# EAGLE board MUXBreakout v46 (EAGLE 9.7.0)
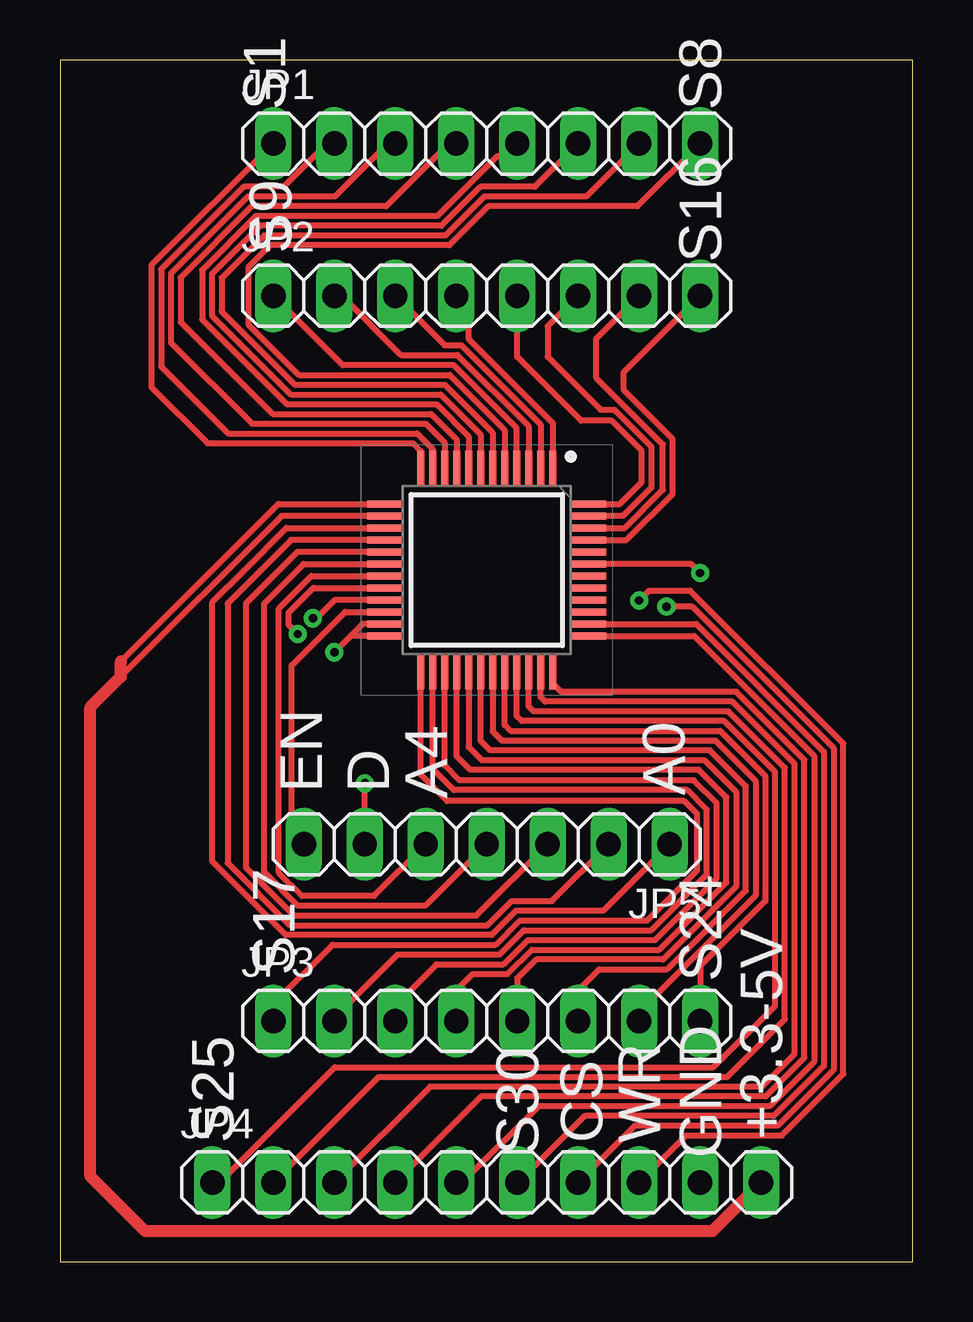
[diagram p0: board, top side]
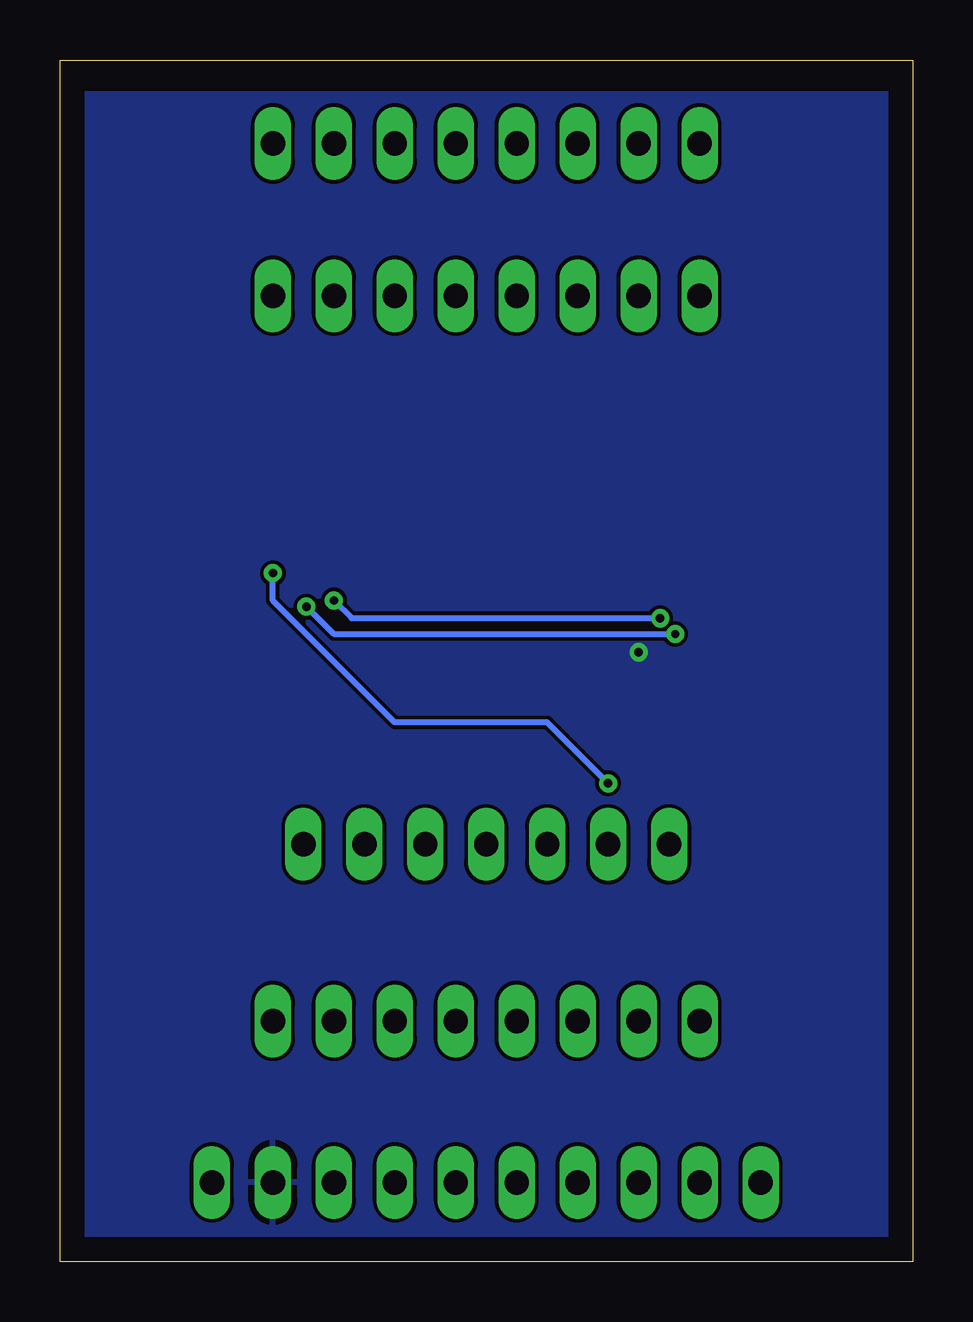
[diagram p1: board, bottom side, seen from below]

Size 35.54 x 50.09 mm. Coordinates in mm from the lower left corner, seen from the top.
Outline: 0,0 35.54,0 35.54,50.09 0,50.09 0,0
Copper layers (1*16): Top 0.035mm / dielectric 1.5mm / Bottom 0.035mm
Design rules "default": minimum track width 6mil, minimum drill 0.35mm, track to track 6mil, track to pad 6mil, pad to pad 6mil, via to via 6mil, smd to smd 6mil, copper to edge 40mil, drill to drill 6mil, minimum pad ring 10mil, minimum via ring 8mil, stop-mask expansion 4mil, vias tented up to drill 0mil, thermal gap 10mil

## Footprints (pad centres in the part's own frame; a part is rotated, then mirrored left to right if it is on the bottom)
QFP50P900X900X120-48N = smd 1.475 x 0.3: 1 -4.238,2.75; 2 -4.238,2.25; 3 -4.238,1.75; 4 -4.238,1.25; 5 -4.238,0.75; 6 -4.238,0.25; 7 -4.238,-0.25; 8 -4.238,-0.75; 9 -4.238,-1.25; 10 -4.238,-1.75; 11 -4.238,-2.25; 12 -4.238,-2.75; 25 4.238,-2.75; 26 4.238,-2.25; 27 4.238,-1.75; 28 4.238,-1.25; 29 4.238,-0.75; 30 4.238,-0.25; 31 4.238,0.25; 32 4.238,0.75; 33 4.238,1.25; 34 4.238,1.75; 35 4.238,2.25; 36 4.238,2.75 | smd 0.3 x 1.475: 13 -2.75,-4.238; 14 -2.25,-4.238; 15 -1.75,-4.238; 16 -1.25,-4.238; 17 -0.75,-4.238; 18 -0.25,-4.238; 19 0.25,-4.238; 20 0.75,-4.238; 21 1.25,-4.238; 22 1.75,-4.238; 23 2.25,-4.238; 24 2.75,-4.238; 37 2.75,4.238; 38 2.25,4.238; 39 1.75,4.238; 40 1.25,4.238; 41 0.75,4.238; 42 0.25,4.238; 43 -0.25,4.238; 44 -0.75,4.238; 45 -1.25,4.238; 46 -1.75,4.238; 47 -2.25,4.238; 48 -2.75,4.238
1X08 = drill 1.016 long: 1 -8.89,0; 2 -6.35,0; 3 -3.81,0; 4 -1.27,0; 5 1.27,0; 6 3.81,0; 7 6.35,0; 8 8.89,0
1X10 = drill 1.016 long: 1 -11.43,0; 2 -8.89,0; 3 -6.35,0; 4 -3.81,0; 5 -1.27,0; 6 1.27,0; 7 3.81,0; 8 6.35,0; 9 8.89,0; 10 11.43,0
1X07 = drill 1.016 long: 1 -7.62,0; 2 -5.08,0; 3 -2.54,0; 4 0,0; 5 2.54,0; 6 5.08,0; 7 7.62,0

## Placement (x,y rotation side)
IC2  ADG732BSUZ-REEL  [QFP50P900X900X120-48N]  17.78,28.83 270 top
JP1  PINHD-1X8  [1X08]  17.78,46.61 0 top
JP2  PINHD-1X8  [1X08]  17.78,40.26 0 top
JP3  PINHD-1X8  [1X08]  17.78,10.03 0 top
JP4  PINHD-1X10  [1X10]  17.78,3.3 0 top
JP5  PINHD-1X7  [1X07]  17.78,17.4 180 top

## Library data of the parts
IC2 = ADG732BSUZ-REEL; DESCRIPTION: 16-/32-Channel, 4 , +1.8 V to +5.5 V and +/-2.5 V Analog Multiplexers.; HEIGHT: 1.2mm; MANUFACTURER_NAME: Analog Devices; MANUFACTURER_PART_NUMBER: ADG732BSUZ-REEL; MOUSER_PART_NUMBER: 584-ADG732BSUZ-R; MOUSER_PRICE-STOCK: https://www.mouser.co.uk/ProductDetail/Analog-Devices/ADG732BSUZ-REEL?qs=BpaRKvA4VqGYLEdHjoL3%2FQ%3D%3D
JP1-JP3 = Connector; CATEGORY: Headers; DESCRIPTION: Header, Straight, 8 Position; MANUFACTURER: Generic; MPN: Generic; OPERATING_TEMPERATURE: Generic; PART_STATUS: Active; PITCH: 0.100" (2.54mm); ROHS_COMPLIANCE: Generic; SERIES: Generic; SUB-CATEGORY: Headers, Male Pins; TYPE: Board to Board or Cable, Unshrouded, Through Hole, Straight
JP4 = Connector; CATEGORY: Headers; DESCRIPTION: Header, Straight, 10 Position; MANUFACTURER: Generic; MPN: Generic; OPERATING_TEMPERATURE: Generic; PART_STATUS: Active; PITCH: 0.100" (2.54mm); ROHS_COMPLIANCE: Generic; SERIES: Generic; SUB-CATEGORY: Headers, Male Pins; TYPE: Board to Board or Cable, Unshrouded, Through Hole, Straight
JP5 = Connector; CATEGORY: Headers; DESCRIPTION: Header, Straight, 7 Position; MANUFACTURER: Generic; MPN: Generic; OPERATING_TEMPERATURE: Generic; PART_STATUS: Active; PITCH: 0.100" (2.54mm); ROHS_COMPLIANCE: Generic; SERIES: Generic; SUB-CATEGORY: Headers, Male Pins; TYPE: Board to Board or Cable, Unshrouded, Through Hole, Straight

## Nets
!EN: IC2.22 JP5.7
A0: IC2.15 JP5.1
A1: IC2.16 JP5.2
A2: IC2.17 JP5.3
A3: IC2.18 JP5.4
A4: IC2.19 JP5.5
D: IC2.43 JP5.6
GND: IC2.23 IC2.24 JP4.9
NC_1: IC2.41
NC_2: IC2.42
NC_3: IC2.44
S1: IC2.12 JP1.1
S2: IC2.11 JP1.2
S3: IC2.10 JP1.3
S4: IC2.9 JP1.4
S5: IC2.8 JP1.5
S6: IC2.7 JP1.6
S7: IC2.6 JP1.7
S8: IC2.5 JP1.8
S9: IC2.4 JP2.1
S10: IC2.3 JP2.2
S11: IC2.2 JP2.3
S12: IC2.1 JP2.4
S13: IC2.48 JP2.5
S14: IC2.47 JP2.6
S15: IC2.46 JP2.7
S16: IC2.45 JP2.8
S17: IC2.25 JP3.1
S18: IC2.26 JP3.2
S19: IC2.27 JP3.3
S20: IC2.28 JP3.4
S21: IC2.29 JP3.5
S22: IC2.30 JP3.6
S23: IC2.31 JP3.7
S24: IC2.32 JP3.8
S25: IC2.33 JP4.1
S26: IC2.34 JP4.2
S27: IC2.35 JP4.3
S28: IC2.36 JP4.4
S29: IC2.37 JP4.5
S30: IC2.38 JP4.6
S31: IC2.20 JP4.7
S32: IC2.21 JP4.8
VDD_2: IC2.13 IC2.14 JP4.10

## Tracks (layer width: path | path; a pad name or v marks a point on that pad's centre or on a via)
!EN
  Top 0.254: JP5.7 9.65,17.91 9.65,24.85 11.88,27.08 IC2.22
A0
  Top 0.254: IC2.15 9.44,30.58 7.65,28.8 6.35,27.49 6.35,16.67 9.41,13.61 17.98,13.61 19,14.63 22.63,14.63 JP5.1
A1
  Top 0.254: IC2.16 9.63,30.08 8.36,28.81 6.98,27.43 6.98,16.62 9.58,14.02 17.81,14.02 18.83,15.04 20.5,15.04 JP5.2
A2
  Top 0.254: JP5.3 17.35,14.43 9.75,14.43 7.75,16.43 7.75,27.43 8.62,28.31 9.89,29.58 IC2.17
A3
  Top 0.254: JP5.4 15.22,14.83 9.92,14.83 8.51,16.24 8.51,27.43 8.76,27.69 10.16,29.08 IC2.18
A4
  Top 0.254: JP5.5 13.08,15.24 10.08,15.24 9.12,16.21 9.12,27.22 10.48,28.58 IC2.19
D  (via drill 0.35)
  Top 0.254: JP5.6 v12.7,19.94 | v26.67,28.7 26.29,29.08 IC2.43
  Bottom 0.254: v12.7,19.94 15.24,22.48 21.59,22.48 26.67,27.56 v26.67,28.7
GND  (via drill 0.35)
  Top 0.254: IC2.23 12.61,26.58 12.06,26.03 | 12.06,26.03 v11.43,25.4 | IC2.24 12.11,26.08 12.06,26.03
  pour Bottom: 0.13,1.02 35.41,1.02 35.41,48.69 0.13,48.69
S1
  Top 0.254: IC2.12 15.03,33.8 14.71,34.11 6.15,34.11 3.81,36.45 3.81,41.53 JP1.1
S2
  Top 0.254: IC2.11 15.53,33.87 14.88,34.52 7.01,34.52 4.22,37.31 4.22,41.36 7.66,44.81 9.32,44.81 11.12,46.61 JP1.2
S3
  Top 0.254: IC2.10 16.03,34.13 15.24,34.92 8,34.92 4.62,38.3 4.62,41.19 7.83,44.4 11.46,44.4 13.67,46.61 JP1.3
S4
  Top 0.254: IC2.9 16.53,34.27 15.47,35.33 8.87,35.33 5.03,39.17 5.03,41.02 8,43.99 13.59,43.99 16.2,46.61 JP1.4
S5
  Top 0.254: IC2.8 17.03,34.4 15.69,35.74 9.45,35.74 5.92,39.27 5.92,41.34 8.17,43.59 15.72,43.59 18.21,46.08 18.52,46.08 JP1.5
S6
  Top 0.254: IC2.7 17.53,34.47 15.86,36.14 9.62,36.14 6.32,39.44 6.32,41.17 8.33,43.18 15.89,43.18 17.52,44.81 19.79,44.81 JP1.6
S7
  Top 0.254: IC2.6 18.03,34.55 16.03,36.55 9.79,36.55 6.73,39.61 6.73,41 8.5,42.77 16.06,42.77 17.68,44.4 21.92,44.4 JP1.7
S8
  Top 0.254: IC2.5 18.53,34.67 16.24,36.96 9.96,36.96 7.85,39.07 7.85,41.45 8.76,42.37 16.23,42.37 17.85,43.99 24.05,43.99 JP1.8
S9
  Top 0.254: JP2.1 11.79,37.36 16.41,37.36 19.03,34.74 IC2.4
S10
  Top 0.254: JP2.2 11.74,40.26 14.2,37.8 16.55,37.8 19.53,34.82 IC2.3
S11
  Top 0.254: JP2.3 16.03,38.2 16.72,38.2 20.03,34.89 IC2.2
S12
  Top 0.254: IC2.1 20.53,34.98 20.52,34.98 17.02,38.48 17.02,39.75 JP2.4
S13
  Top 0.254: IC2.48 23.32,31.58 24.23,32.49 24.23,33.8 22.98,35.05 21.72,35.05 19.05,37.72 JP2.5
S14
  Top 0.254: IC2.47 23.45,31.08 24.64,32.26 24.64,33.97 23.1,35.51 22.53,35.51 20.32,37.72 20.32,38.99 JP2.6
S15
  Top 0.254: IC2.46 23.53,30.58 25.12,32.17 25.12,34.06 22.35,36.83 22.35,38.48 JP2.7
S16
  Top 0.254: IC2.45 23.6,30.08 25.53,32 25.53,34.29 23.49,36.32 23.49,37.08 JP2.8
S17
  Top 0.254: IC2.25 15.03,20.3 16.13,19.2 26.01,19.2 26.54,18.67 26.54,16.31 24.46,14.22 19.16,14.22 18.15,13.21 11.35,13.21 8.89,10.74 JP3.1
S18
  Top 0.254: JP3.2 11.43,10.16 14.07,12.8 18.32,12.8 19.33,13.82 24.63,13.82 26.95,16.14 26.95,18.84 26.13,19.66 16.41,19.66 15.53,20.54 IC2.26
S19
  Top 0.254: JP3.3 13.97,10.67 15.7,12.39 18.48,12.39 19.5,13.41 24.8,13.41 27.36,15.97 27.36,19.13 26.42,20.07 16.64,20.07 16.03,20.67 IC2.27
S20
  Top 0.254: JP3.4 16.51,11.3 17.2,11.99 18.65,11.99 19.67,13.01 24.97,13.01 27.76,15.8 27.76,19.35 26.62,20.5 17.09,20.5 16.53,21.06 IC2.28
S21
  Top 0.254: JP3.5 19.05,11.81 19.84,12.6 25.13,12.6 28.17,15.63 28.17,19.58 26.85,20.9 17.58,20.9 17.03,21.45 IC2.29
S22
  Top 0.254: JP3.6 21.59,11.3 22.48,12.19 25.3,12.19 28.58,15.47 28.58,19.81 27.08,21.31 17.93,21.31 17.53,21.71 IC2.30
S23
  Top 0.254: JP3.7 24.13,10.41 28.98,15.27 28.98,20.04 27.3,21.72 18.41,21.72 18.03,22.1 IC2.31
S24
  Top 0.254: JP3.8 26.67,12.32 29.39,15.04 29.39,20.24 27.51,22.12 18.77,22.12 18.53,22.36 IC2.32
S25
  Top 0.254: IC2.33 19.03,22.75 19.25,22.53 27.68,22.53 29.79,20.41 29.79,10.67 27.23,8.1 11.46,8.1 6.65,3.3 JP4.1
S26
  Top 0.254: IC2.34 19.53,23.14 19.74,22.94 27.84,22.94 30.2,20.58 30.2,10.1 27.79,7.7 13.28,7.7 JP4.2
S27
  Top 0.254: IC2.35 20.03,23.53 20.22,23.34 28.01,23.34 30.61,20.75 30.61,8.66 29.23,7.29 15.42,7.29 JP4.3
S28
  Top 0.254: IC2.36 20.53,24.11 20.89,23.75 28.18,23.75 31.01,20.92 31.01,8.5 29.4,6.88 17.55,6.88 JP4.4
S29
  Top 0.254: IC2.37 26.43,26.08 31.42,21.09 31.42,8.33 29.57,6.48 19.94,6.48 16.76,3.3 JP4.5
S30
  Top 0.254: IC2.38 26.5,26.58 31.83,21.25 31.83,8.16 29.74,6.07 21.87,6.07 19.1,3.3 JP4.6
S31  (via drill 0.35)
  Top 0.254: JP4.7 23.95,5.66 29.91,5.66 32.23,7.99 32.23,21.42 26.35,27.3 v25.27,27.3 | v9.91,26.16 9.53,26.54 9.53,27.05 10.55,28.08 IC2.20
  Bottom 0.254: v25.27,27.3 24.13,26.16 v9.91,26.16
S32  (via drill 0.35)
  Top 0.254: JP4.8 26.09,5.26 30.07,5.26 32.64,7.82 32.64,21.59 26.27,27.96 24.53,27.96 v24.13,27.56 | IC2.21 11.45,27.58 10.69,26.82 v10.53,26.82
  Bottom 0.254: v24.13,27.56 23.39,26.82 v10.53,26.82
VDD_2
  Top 0.254: 2.54,25.02 9.1,31.58 IC2.13 | 2.54,24.38 9.23,31.08 IC2.14
  Top 0.508: 2.54,25.02 2.54,24.38 1.27,23.11 1.27,3.55 3.55,1.27 27.18,1.27 JP4.10

## Text on the board
tPlace: S1 | S8 | S9 | S16 | EN | D | A4 | A0 | S17 | S24 | S25 | CS | WR | +3.3-5V | S30 | GND